# EAGLE board relais platine v4 (EAGLE 6.1)
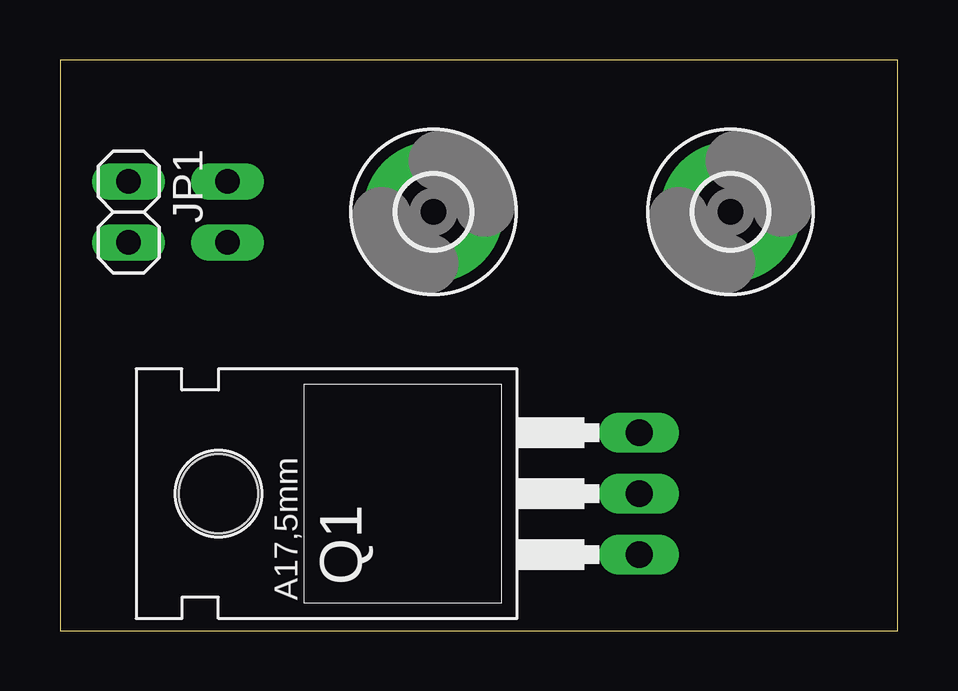
[diagram p0: board, top side]
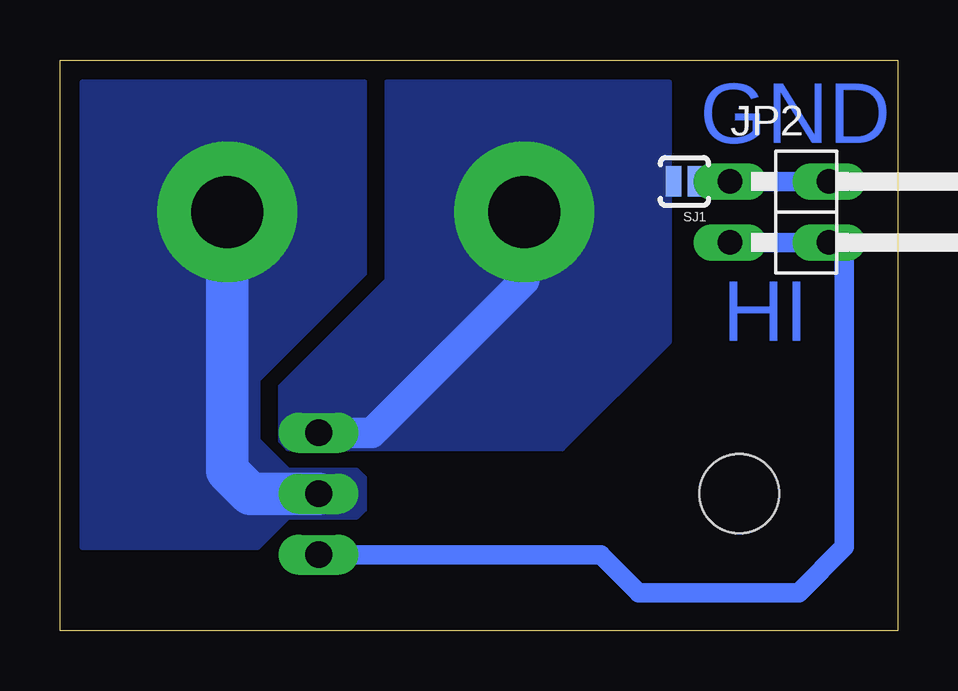
[diagram p1: board, bottom side, seen from below]

Size 34.91 x 23.8 mm. Coordinates in mm from the lower left corner, seen from the top.
Outline: 0,0 34.91,0 34.91,23.8 0,23.8 0,0
Copper layers (1*16): Top 0.035mm / dielectric 1.5mm / Bottom 0.035mm
Design rules: minimum track width 10mil, minimum drill 24mil, track to track 12mil, track to pad 12mil, pad to pad 12mil, via to via 12mil, smd to smd 10mil, copper to edge 12mil, drill to drill 12mil, minimum pad ring 10mil, minimum via ring 10mil, stop-mask expansion 4mil, vias tented up to drill 0mil, thermal gap 12mil

## Footprints (pad centres in the part's own frame; a part is rotated, then mirrored left to right if it is on the bottom)
3,0-PAD = drill 3 pad 5.842: B3,0 0,0
1X02 = drill 1.016 long: 1 -1.27,0; 2 1.27,0
1X02/90 = drill 1.016 long: 1 -1.27,-3.81; 2 1.27,-3.81
TO220 = drill 1.118 long: 1 -2.54,-6.35; 2 0,-6.35; 3 2.54,-6.35 | hole 3.302: 0,11.176
SJ_2S-NO = smd 0.635 x 1.27: 1 -0.45,0; 2 0.45,0

## Placement (x,y rotation side)
H1  MOUNT-PAD-ROUND3.0  [3,0-PAD]  27.94,17.46 0 top
H2  MOUNT-PAD-ROUND3.0  [3,0-PAD]  15.56,17.46 0 top
JP1  [1X02]  2.86,17.46 270 top
JP2  [1X02/90]  3.17,17.46 270 bottom
Q1  IRF540  [TO220]  17.78,5.71 90 top
SJ1  SOLDERJUMPER-OLDNO  [SJ_2S-NO]  8.89,18.73 180 bottom

## Library data of the parts
H1 H2 = holes
JP1 JP2 = pinhead
Q1 = transistor-fet
SJ1 = SparkFun-Retired

## Nets
GND: H2.B3,0 Q1.3 SJ1.2
HIGH: H1.B3,0 Q1.2
N$1: JP1.1 JP2.1 SJ1.1
N$2: JP1.2 JP2.2 Q1.1

## Tracks (layer width: path | path; a pad name or v marks a point on that pad's centre or on a via)
GND
  Bottom 0.813: 14.29,18.73 H2.B3,0
  Bottom 1.27: Q1.3 21.91,8.26 15.56,14.61 H2.B3,0
  pour Bottom (no thermals): 21.27,22.86 21.27,14.61 25.72,10.16 25.72,7.94 25.4,7.62 13.97,7.62 9.53,12.06 9.53,22.86
HIGH
  Bottom 1.778: Q1.2 26.99,5.71 27.94,6.67 H1.B3,0
  pour Bottom (no thermals): 22.54,6.67 25.4,6.67 26.67,7.94 26.67,10.48 22.23,14.92 22.23,22.86 33.97,22.86 33.97,3.49 26.67,3.49 25.4,4.76 22.54,4.76 22.23,5.08 22.23,6.35
N$1
  Bottom 0.61: SJ1.1 JP2.1
  Bottom 0.813: JP1.1 JP2.1 8.26,18.73
N$2
  Bottom 0.813: JP2.2 JP1.2 2.22,15.56 2.22,3.49 4.13,1.59 10.79,1.59 12.38,3.17 Q1.1

## Text on the board
Bottom: GND | HI